# Altium PCB IP5568-MCU-188-3LED-ACL-V1.1.PcbDoc (part 1 of 2)
Units mm, origin at the board's own origin, x right, y up, seen from the top; angles counter-clockwise.
Board outline 55.37 x 39.29 mm, 4 copper layers (Top Layer, Mid-Layer 1, Mid-Layer 2, Bottom Layer); 97 components, 84 nets, 371 pads, 292 vias.
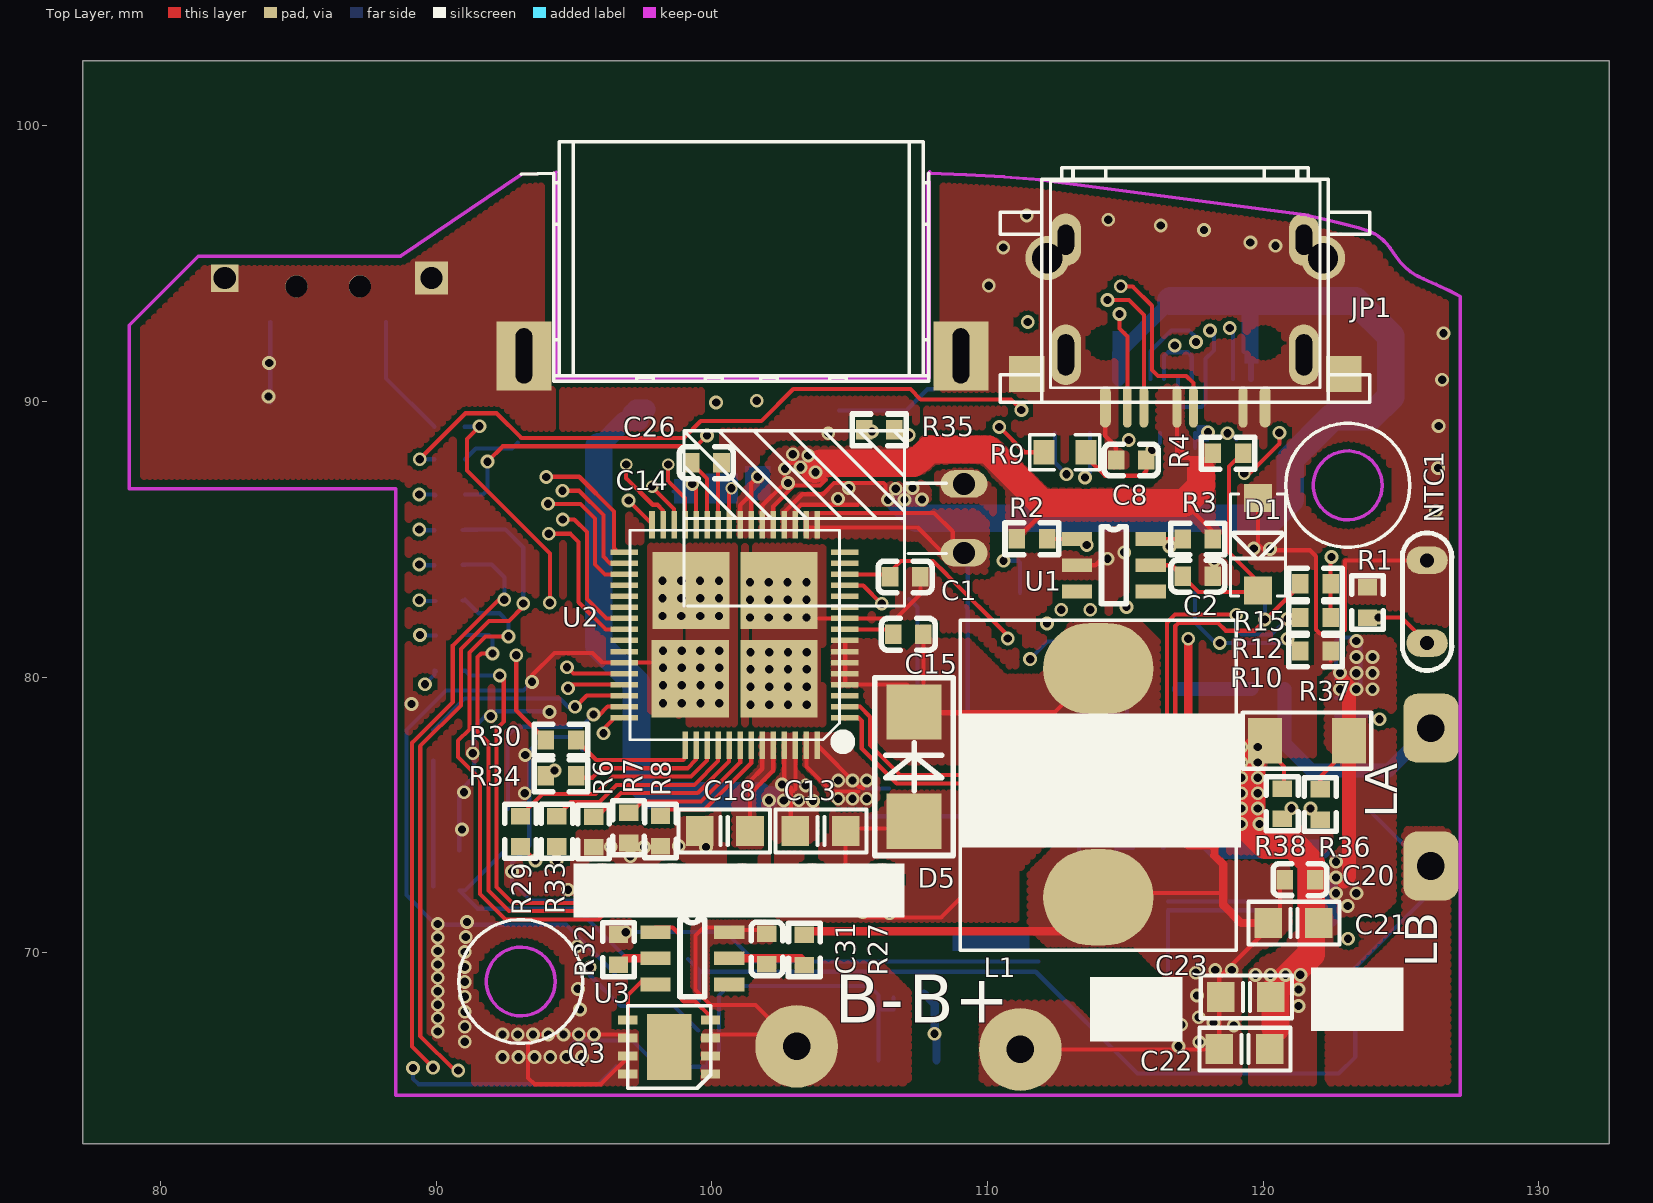
[diagram p0: Top Layer view]
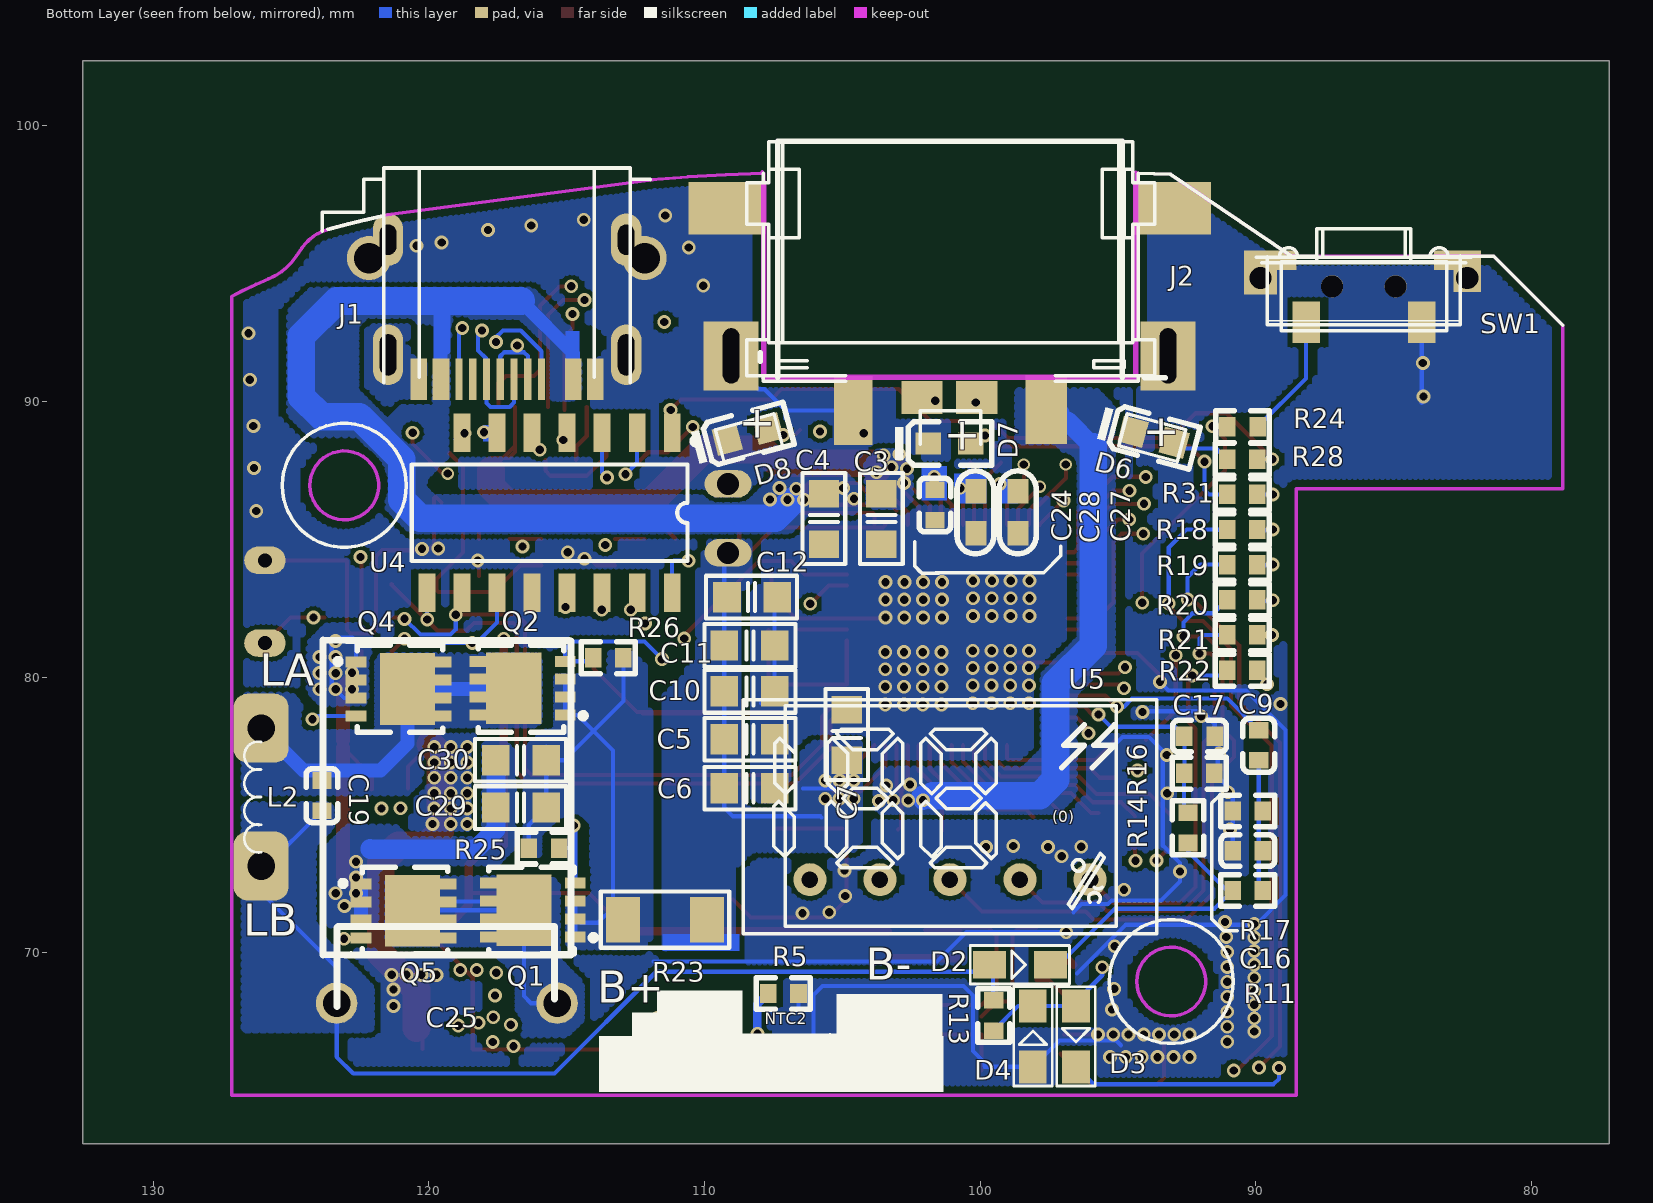
[diagram p1: Bottom Layer view, seen from below]
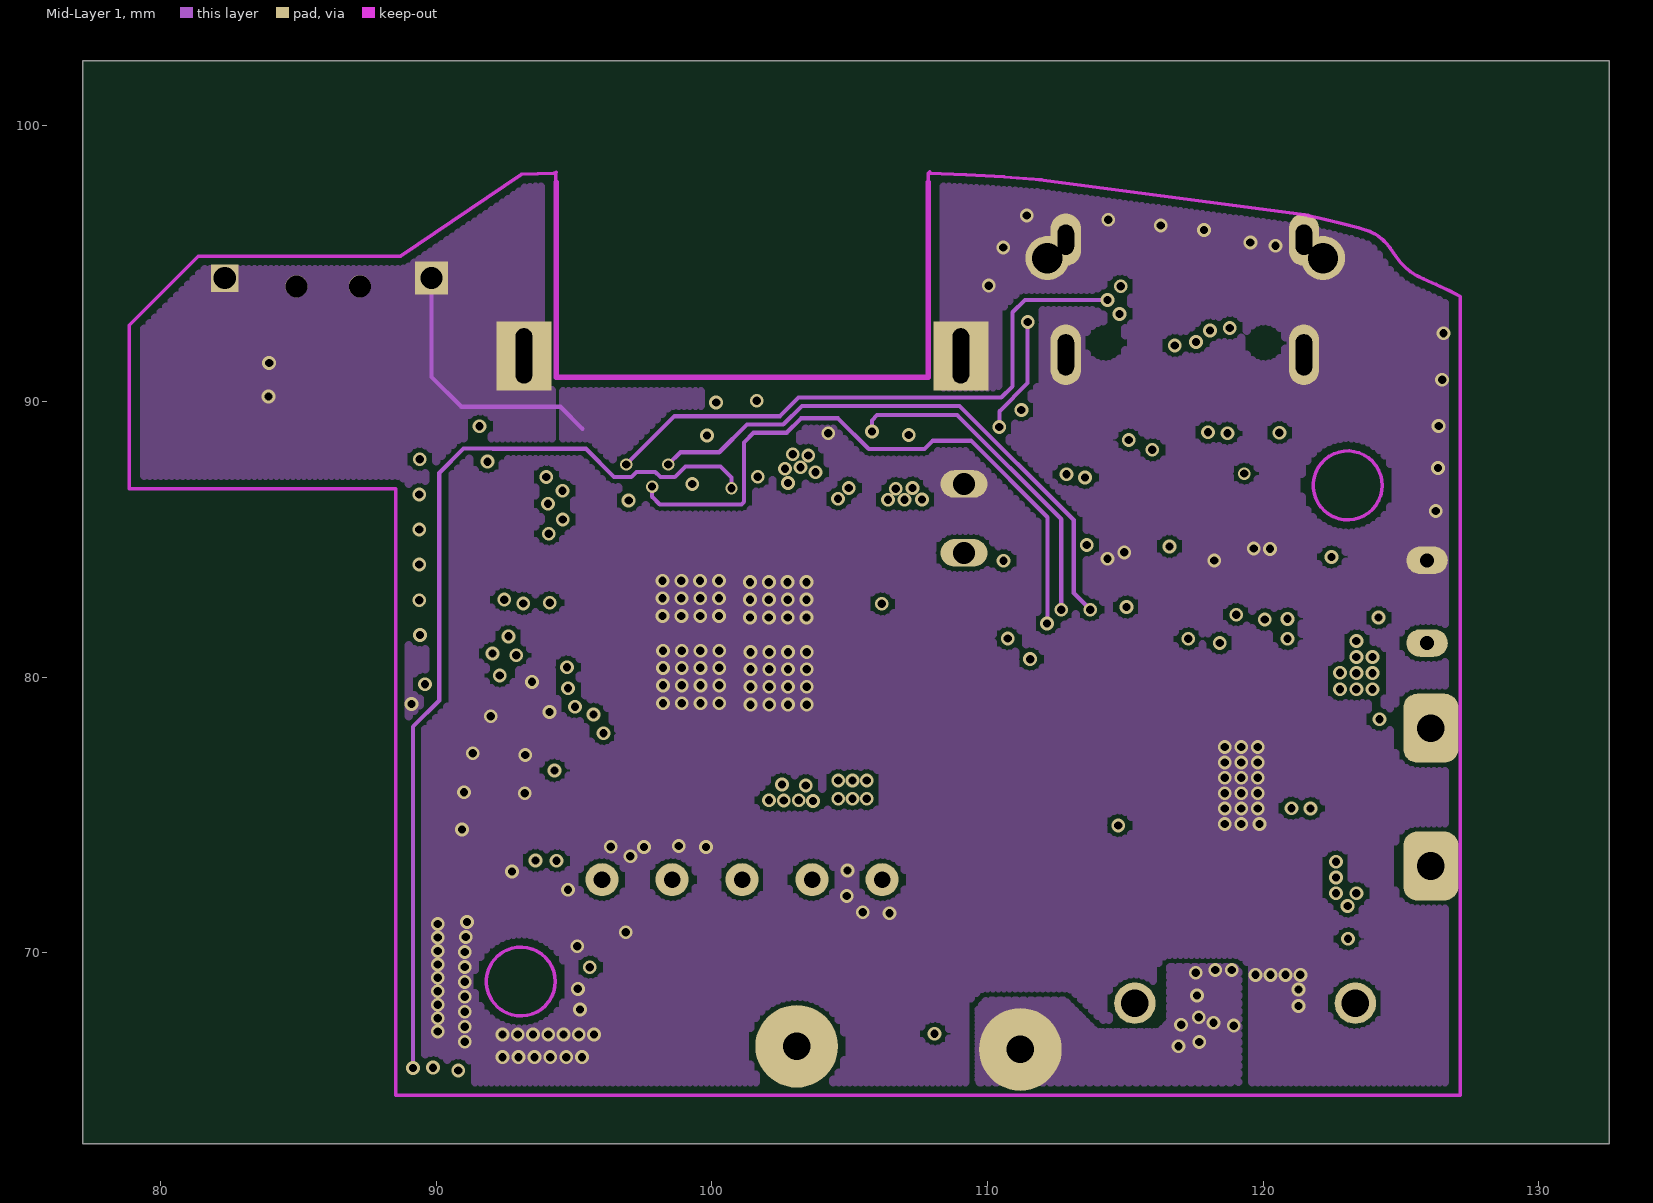
[diagram p2: Mid-Layer 1]
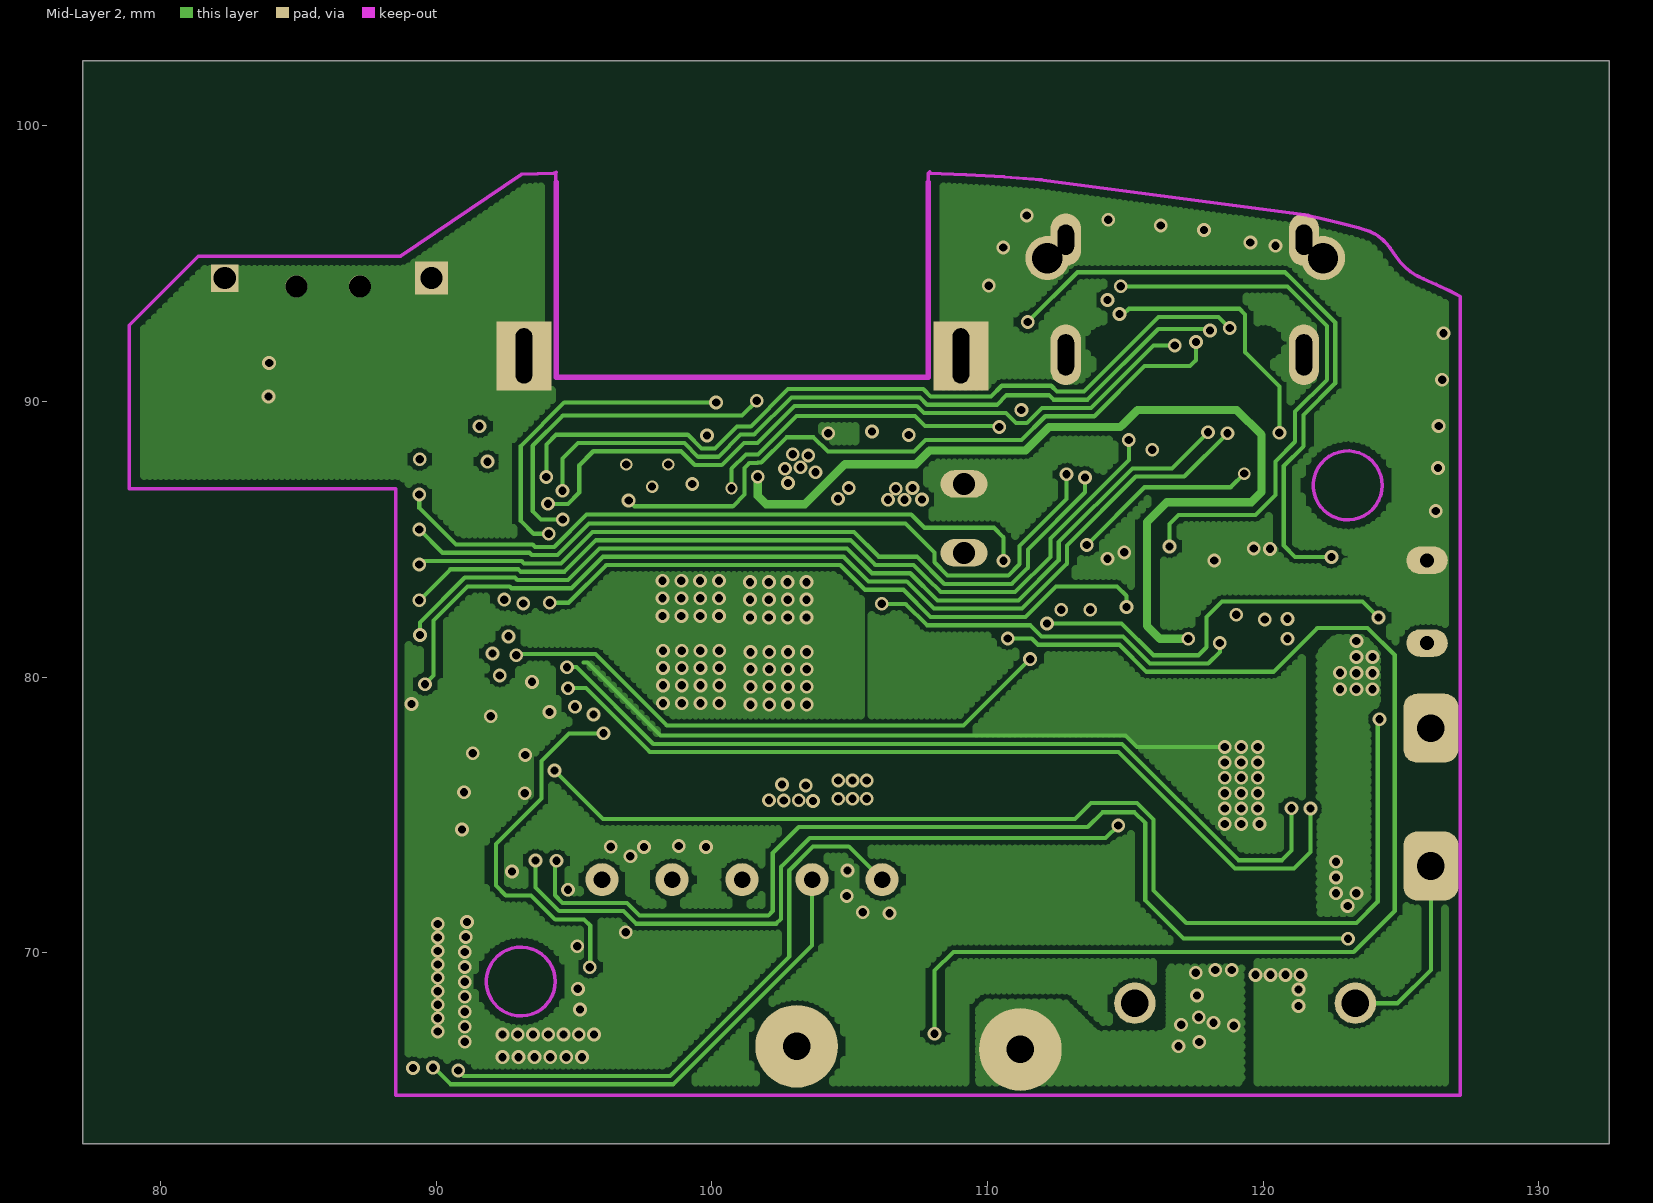
[diagram p3: Mid-Layer 2]
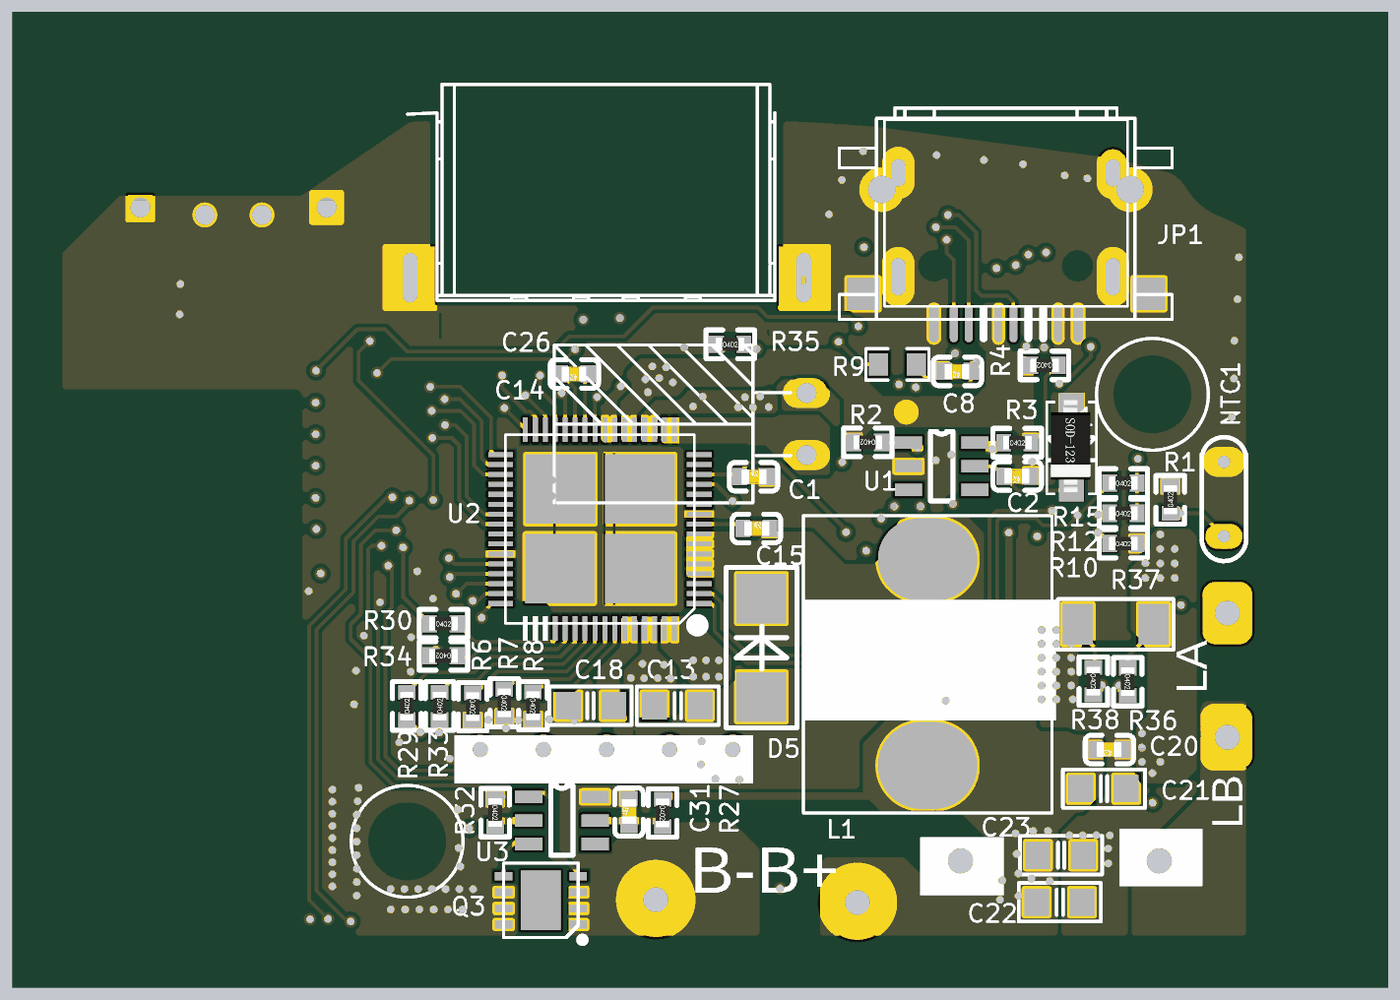
[diagram p5: 3D render of the assembled board from above, using the file's embedded part models]

## Layer stack, top to bottom
Top Layer: signal copper 0.0356
Dielectric: core 0.32, FR-4, Dk 4.8
Mid-Layer 1: signal copper 0.0356
Dielectric: prepreg 0.32, FR-4, Dk 4.8
Mid-Layer 2: signal copper 0.0356
Dielectric: core 0.32, FR-4, Dk 4.8
Bottom Layer: signal copper 0.0356

## Board outline
80.67,102.362 132.55,102.362 132.55,90.348 132.55,63.068 124.739,63.068 77.178,63.068 77.178,85.458 77.178,102.362

## Design rules (kind name [scope] priority, off if disabled: settings)
Clearance Clearance_1 [OnLayer('Keep-Out Layer')] p1: gap=0.254
Clearance [All] p2: gap=0.15
HoleToHoleClearance [All] p1: gap=0 allowstackedmicrovias=TRUE
MinimumSolderMaskSliver [All] p1: minsoldermaskwidth=0
PlaneConnect [All] p1: planeconnectstyle=Direct reliefexpansion=0.508 reliefentries=4 reliefconductorwidth=0.254 reliefairgap=0.254
PolygonConnect [All] p1: connectstyle=Direct reliefconductorwidth=0.254 reliefentries=4 polygonreliefangle="90 Angle"
RoutingVias [All] p1: holewidth=0.711 width=1.27 viastyle="Through Hole" minholewidth=0.2 minwidth=0.2 maxholewidth=0.711 maxwidth=1.27
SilkToSilkClearance [All] p1: silktosilkclearance=0
SilkscreenOverComponentPads [All] p1: minsilkscreentomaskgap=0
SolderMaskExpansion [All] p1: expansion=0.102
Width [All] p1: maxlimit=2 minlimit=0.15 preferedwidth=0.254
23 further rules are at their usual default settings.

## Components (designator, comment, footprint, x,y, rotation, side; value= is the part's Value field where it differs from the comment)
B+ "BAT+" BAT-3X3 111.188,66.497 r0 top
B- "BAT-" BAT-3X3 103.073,66.611 r0 top
C1 "100NF/10V" 0402C 107.01,83.642 r0 top
C2 "1UF/10V" 0402C 117.627,83.668 r180 top
C3 "10uF/16V" C0805 103.581,86.652 r270 bottom
C4 "10uF/16V" C0805 105.664,86.652 r270 bottom
C5 "22uF/16V" C0805 107.455,77.749 r0 bottom
C6 "22uF/16V" C0805 107.455,75.971 r0 bottom
C7 "22uF/16V" C0805 104.838,78.816 r270 bottom
C8 "100NF/16V" 0402C 115.214,87.884 r180 top
C9 "15nF/50V" 0402C 89.891,77.534 r270 bottom
C10 "22uF/16V" C0805 107.455,79.489 r0 bottom
C11 "22uF/16V" C0805 107.455,81.153 r0 bottom
C12 "22uF/16V" C0805 109.182,82.906 r180 bottom
C13 "10uF/16V" C0805 104.851,74.422 r180 top
C14 "NC" CAP-6.3X8-P2.5-S1 106.985,85.255 r180 top locked
C15 "100NF/25V" 0402C 107.124,81.559 r0 top
C16 "15nF/50V" 0402C 90.284,73.711 r0 bottom
C17 "2.2nF/50V" 0402C 92.037,77.864 r0 bottom
C18 "10uF/16V" C0805 99.555,74.422 r0 top
C19 "NC" 0402C 123.876,75.705 r270 bottom
C20 "100NF/10V" 0402C 121.336,72.657 r180 top
C21 "22uF/6.3V" C0805 122.009,71.082 r180 top
C22 "22uF/6.3V" C0805 120.231,66.51 r180 top
C23 "22uF/6.3V" C0805 120.282,68.402 r180 top
C24 "100NF/10V" 0402C 101.638,86.246 r90 bottom
C25 "400NF/100V/CBB" "CAP-CBB-404 100V" 119.342,68.174 r0 bottom locked
C26 "100NF/25V" 0402C 99.797,87.782 r180 top
C27 "2.2uF/10V" 0603C 98.615,85.979 r270 bottom
C28 "2.2uF/10V" 0603C 100.152,85.979 r270 bottom
C29 "10uF/16V" C0805 117.564,75.273 r180 bottom
C30 "10uF/16V" C0805 117.564,76.987 r180 bottom
C31 "100NF/16V" 0402C 101.994,70.142 r90 top
D1 "NC/ZMM5V6" SOD-123 119.812,84.823 r270 top
D2 "1N5819" SOD-323 98.552,69.571 r180 bottom
D3 "1N5819" SOD-323 96.52,66.967 r270 bottom
D4 "1N5819" SOD-323 98.082,66.967 r90 bottom
D5 "SS34" SMA 107.328,74.778 r90 top
D6 "绿灯 0603" LC-0603_LED_S1#1 93.701,88.709 r195 bottom
D7 "绿灯 0603" LC-0603_LED_S1#2 101.105,88.481 r180 bottom
D8 "绿灯 0603" LC-0603_LED_S1#1 108.433,88.824 r165 bottom
J1 "TYPEC_16PIN表贴" "TYPE C 2.0-16pin 表贴" 117.157,93.345 r180 bottom locked
J2 "USB-A 短体8.5沉板1.9" USB-AF8.5沉板1.9前插后贴 101.105,93.345 r0 bottom locked
JP1 "Lightning 母座表贴" Lightning_10 117.17,92.507 r0 top locked
L1 "2.2uH/10*10*4" L1040 112.7,73.52 r270 top
L2 "无线充线圈" 2P-2.5L 126.086,73.152 r90 bottom
NTC1 "100K/B=3950" NTC-插件#1 125.946,82.74 r90 top
NTC2 "100K/B=3950" NTC-插件#2 107.048,66.103 r180 bottom
Q1 "RU40L12M2" PDFN3333-8_L3.1-W3.2-P0.65-LS3.4-BL 116.218,71.552 r90 bottom
Q2 "RU40L12M2" PDFN3333-8_L3.1-W3.2-P0.65-LS3.4-BL 116.586,79.604 r90 bottom
Q3 "ET8830" ET-8830-DFN3x3-8L 98.45,66.586 r90 top
Q4 "RU3030M3" PDFN3333-8_L3.1-W3.2-P0.65-LS3.4-BL 121.107,79.572 r270 bottom
Q5 "RU3030M3" PDFN3333-8_L3.1-W3.2-P0.65-LS3.4-BL 120.929,71.52 r270 bottom
R1 "120K/1%" 0402R 123.787,82.715 r90 top
R2 "2.2K/5%" 0402R 111.608,85.026 r180 top
R3 "2.2K/5%" 0402R 117.627,85.014 r0 top
R4 "2.2K/5%" 0402R 118.72,88.125 r180 top
R5 "120K/1%" 0402R 107.137,68.529 r180 bottom
R6 "20K/1%" 0402R 95.707,74.384 r270 top
R7 "20K/1%" 0402R 96.977,74.536 r270 top
R8 "20K/1%" 0402R 98.133,74.422 r270 top
R9 "10R/5%" 0603R 112.801,88.163 r0 top
R10 "510K/5%" 0402R 121.895,80.95 r0 top
R11 "3.3K/1%" 0402R 90.291,72.263 r180 bottom
R12 "2.2K/5%" 0402R 121.895,82.169 r0 top
R13 "20K/1%" 0402R 99.504,67.729 r270 bottom
R14 "100K/1%" 0402R 92.456,74.536 r270 bottom
R15 "2.2K/5%" 0402R 121.895,83.388 r0 top
R16 "10K/1%" 0402R 92.05,76.517 r0 bottom
R17 "33K/1%" 0402R 90.291,75.146 r180 bottom
R18 "100R/5%" 0402R 90.487,85.361 r180 bottom
R19 "100R/5%" 0402R 90.487,84.087 r180 bottom
R20 "100R/5%" 0402R 90.487,82.812 r180 bottom
R21 "100R/5%" 0402R 90.487,81.538 r180 bottom
R22 "100R/5%" 0402R 90.487,80.251 r180 bottom
R23 "0R/5%" 1206 109.906,71.209 r0 bottom
R24 "10K/5%" 0402R 90.475,89.09 r180 bottom
R25 "NC" 0402R 115.824,73.8 r0 bottom
R26 "NC" 0402R 113.487,80.709 r180 bottom
R27 "470R/5%" 0402R 103.353,70.104 r270 top
R28 "100R/5%" 0402R 90.487,87.909 r0 bottom
R29 "2R/1%" 0402R 93.053,74.409 r90 top
R30 "2R/1%" 0402R 94.526,77.724 r0 top
R31 "100R/5%" 0402R 90.487,86.635 r0 bottom
R32 "2K/1%" 0402R 96.609,70.117 r270 top
R33 "2R/1%" 0402R 94.374,74.409 r90 top
R34 "2R/1%" 0402R 94.526,76.429 r180 top
R35 "100R" 0402R 106.07,88.976 r0 top
R36 "0R/1%" 0402R 122.072,75.387 r270 top
R37 "20mR/1%/1206" 1206 120.066,77.699 r0 top
R38 "0R/1%" 0402R 120.688,75.413 r270 top
SW1 "3*6*3.5测按按键" SW-3X6X3.5mm-定位柱0.7-通孔 87.224,94.183 r270 bottom
U1 "苹果握手协议芯片" SOT23-6 113.246,85.014 r0 top
U2 "IP5568_LED" QFN64-8*8-0.4 100.825,81.534 r180 top
U3 "CM1003-S11ED-4.4V" SOT23-6 97.955,70.752 r0 top
U4 "MCU" SOP16L 115.621,85.966 r0 bottom
U5 "SMG-188" SMG-188-CYZ2342-5-75BWGD 101.092,72.657 r180 bottom locked

## Footprints (in the part's own frame and the unit in brackets; to place one, negate y for a bottom-side part, rotate by r counter-clockwise, add the part's x,y. Pads: shape width x height; smd on the part's side, far side on the other; paste and mask are expansions set on the pad)
2P-2.5L [mm]
  rrect50% 2.5x2 hole 1: 1(0,0) 2(5,0)
  silkscreen extent 0.49,0 4.51,0.61
0402C [mm]
  rect 0.6x0.7 smd mask+0.051: 1(-0.55,0) 2(0.55,0)
  silkscreen extent -0.97,-0.58 0.97,0.58, body extent -0.48,-0.3 0.52,0.3, height 0.2
0402R [mm]
  rect 0.6x0.7 smd mask+0.051: 1(-0.55,0) 2(0.55,0)
  silkscreen extent -0.97,-0.58 0.97,0.58, body extent -0.57,-0.27 0.58,0.28, height 0.41
0603C [mil]
  rect 35x30 smd: 1(-30,0) 2(30,0)
  silkscreen extent -59,-27 59,26
0603R [mil]
  rect 30x35.43 smd: 1(-30,0) 2(30,0)
  silkscreen extent -50,-25 50,25
1206 [mil]
  rect 48x65 smd: 1(0,0) 2(120,0)
  silkscreen extent -32,-40 152,40
BAT-3X3 [mm]
  round 3 hole 1: 1(0,0)
C0805 [mm]
  rect 1x1.1 smd: 1(0,0) 2(1.826,0)
  silkscreen extent -0.76,-0.77 2.55,0.77
CAP-6.3X8-P2.5-S1 [mm] "Electrolytic CAP; 2 Leads, P=2.5mm,body:6.3*12"
  oval 1.7x1 hole 0.8: 1(-2.159,0.742) 2(-2.159,-1.758)
  silkscreen extent -1.52,-3.68 8,2.67
"CAP-CBB-404 100V" [mm] "CBB电容"
  round 1.5 hole 1: 1(-4,0) 2(4,0)
  silkscreen extent -4.5,-13.17 4.5,0.11
ET-8830-DFN3x3-8L [mm]
  round 0.5 on Top Overlay: 0(-1.59,-1.67)
  rect 2.4x1.6 smd: 0(0,0)
  rect 0.33x0.7 smd: 1(-0.975,-1.5) 2(-0.325,-1.5) 3(0.325,-1.5) 4(0.975,-1.5) 5(0.975,1.5) 6(0.325,1.5) 7(-0.325,1.5) 8(-0.975,1.5)
  silkscreen extent -1.5,-1.5 1.5,1.5
L1040 [mm]
  oval 3.3x4 smd: 1(-6.793,1.318)
  oval 3.5x4 smd: 2(1.507,1.318)
  silkscreen extent -8.56,-3.68 3.42,6.32
LC-0603_LED_S1#1 [mm]
  rect 0.93x0.98 smd: A(0.77,0) K(-0.77,0)
  silkscreen extent -1.98,-0.79 1.54,0.79, body extent -1,-0.8 1,0.8, height 0.6
LC-0603_LED_S1#2 [mm]
  rect 0.93x0.8 smd: A(0.77,0) K(-0.77,0)
  silkscreen extent -1.98,-0.79 1.54,0.79, body extent -0.8,-0.4 0.8,0.4, height 0.6
Lightning_10 [mm] "铁壳"
  rect 1.3x1.3 smd: 0(-5.751,-1.5) 0(5.751,-1.5)
  round 1.6 hole 1.1: 0(-5,2.7) 0(5,2.7)
  oval 0.4x1.5 smd: 1(2.9,-2.7) 10(-2.9,-2.7)
  oval 0.32x1.5 smd: 2(2.1,-2.7) 5(0.3,-2.7) 6(-0.3,-2.7) 8(-1.5,-2.7) 9(-2.1,-2.7)
  oval 0.32x1.5 on Top Overlay: 3(1.5,-2.7) 4(0.9,-2.7) 7(-0.9,-2.7)
  silkscreen extent -4.89,-2 4.89,6
NTC-插件#1 [mm]
  oval 1x1.5 hole 0.5: 1(-1.5,0) 2(1.5,0)
  silkscreen extent -2.49,-0.9 2.49,0.9
NTC-插件#2 [mm]
  oval 1x1.5 smd: 1(-1.1,0) 2(1,0)
  silkscreen extent -2.49,-0.9 2.49,0.9
PDFN3333-8_L3.1-W3.2-P0.65-LS3.4-BL [mm]
  rect 0.4x0.75 smd paste-100 mask+0.051: 1(-0.975,-1.533) 2(-0.325,-1.533) 3(0.325,-1.533) 4(0.975,-1.533)
  rect 0.4x0.8 smd paste-100 mask+0.051: 5(0.975,1.533) 6(0.325,1.533) 7(-0.325,1.533) 8(-0.975,1.533)
  rect 2.6x2 smd paste-100 mask+0.051: 9(-0.005,0.333)
  silkscreen extent -1.59,-2.29 1.56,1.61
QFN64-8*8-0.4 [mm]
  rect 1x0.2 smd: 1(-4,3) 2(-4,2.6) 3(-4,2.2) 4(-4,1.8) 5(-4,1.4) 6(-4,1) 7(-4,0.6) 8(-4,0.2) 9(-4,-0.2) 10(-4,-0.6) 11(-4,-1) 12(-4,-1.4) 13(-4,-1.8) 14(-4,-2.2) 15(-4,-2.6) 16(-4,-3) 33(4,-3) 34(4,-2.6) 35(4,-2.2) 36(4,-1.8) 37(4,-1.4) 38(4,-1) 39(4,-0.6) 40(4,-0.2) 41(4,0.2) 42(4,0.6) 43(4,1) 44(4,1.4) 45(4,1.8) 46(4,2.2) 47(4,2.6) 48(4,3)
  rect 0.2x1 smd: 17(-3,-4) 18(-2.6,-4) 19(-2.2,-4) 20(-1.8,-4) 21(-1.4,-4) 22(-1,-4) 23(-0.6,-4) 24(-0.2,-4) 25(0.2,-4) 26(0.6,-4) 27(1,-4) 28(1.4,-4) 29(1.8,-4) 30(2.2,-4) 31(2.6,-4) 32(3,-4) 52(1.8,4) 53(1.4,4) 54(1,4) 55(0.6,4) 56(0.2,4) 57(-0.2,4) 58(-0.6,4) 59(-1,4) 60(-1.4,4) 61(-1.8,4) 62(-2.2,4) 63(-2.6,4) 64(-3,4)
  rect 0.2x1 on Top Overlay: 49(3,4) 50(2.6,4) 51(2.2,4)
  rect 2.8x2.8 smd: 65(-1.612,1.588) 65(-1.612,-1.612) 65(1.588,-1.612) 65(1.613,1.588)
  silkscreen extent -4.12,-3.8 3.8,4.07
SMA [mm]
  rect 2x2 smd: 1(0,0) 2(3.962,0)
  silkscreen extent -1.24,-1.42 5.21,1.42
SMG-188-CYZ2342-5-75BWGD [mm]
  round 1.2 hole 0.6: 1(-5.08,0) 2(-2.54,0) 3(0,0) 4(2.54,0) 5(5.08,0)
  silkscreen extent -7.5,-1.97 7.5,6.53
SOD-123 [mil]
  rect 40x40 smd mask+0.98: 1(-65.94,0) 2(65.94,0)
  silkscreen extent -72,-39 74,39, body extent -75,-33 71,30, height 47
SOD-323 [mm]
  rect 1.2x1 smd: A(-1.1,0) K(1.1,0)
  silkscreen extent -1.8,-0.7 1.8,0.7
SOP16L [mm]
  rect 0.6x1.4 smd: 1(-4.445,-2.9) 2(-3.175,-2.9) 3(-1.905,-2.9) 4(-0.635,-2.9) 5(0.635,-2.9) 6(1.905,-2.9) 7(3.175,-2.9) 9(4.445,2.9) 10(3.175,2.9) 11(1.905,2.9) 12(0.635,2.9) 13(-0.635,2.9) 14(-1.905,2.9) 15(-3.175,2.9) 16(-4.445,2.9)
  rect 0.6x1.4 on Bottom Overlay: 8(4.445,-2.9)
  silkscreen extent -5.39,-2.7 5,1.75
SOT23-6 [mm]
  rect 1.1x0.5 smd: 1(0,0) 2(0,-0.95) 3(0,-1.9) 4(2.676,-1.9) 5(2.676,-0.95) 6(2.676,0)
  silkscreen extent 0.89,-2.35 1.79,0.45
SW-3X6X3.5mm-定位柱0.7-通孔 [mm] "TS-B003-Y"
  rect 0.7x1.9 smd: 0(-0.945,-2.248)
  rect 0.7x1.7 smd: 0(-0.945,4.55)
  rect 1.2x1.2 hole 0.8: 0(-0.3,-2.6)
  rect 1x1 hole 0.8: 0(-0.3,4.9)
  round 0.8 hole 0.8 unplated: 0(0,0) 0(0,2.3)
  rect 1.5x1 smd: 1(1.3,-0.95) 2(1.3,3.25)
  silkscreen extent -2.08,-2.75 1.4,5.05
"TYPE C 2.0-16pin 表贴" [mm]
  oval 1.1x2.2 hole 0.6 slot 1.5 at 90 deg: 0(-4.32,-1.65) 0(4.32,-1.65)
  oval 1.1x1.9 hole 0.6 slot 1.1 at 90 deg: 0(-4.32,2.53) 0(4.32,2.53)
  round 0.75 on Keep-Out: 0(-2.89,-1.211) 0(2.89,-1.211)
  round 0.75 on Mech1: 0(-2.89,-1.211) 0(2.89,-1.211)
  rect 0.6x1.5 smd: A1(3.2,-2.529) A4(2.4,-2.529) B1(-3.2,-2.529) B4(-2.4,-2.529)
  rect 0.26x1.5 smd: A5(1.25,-2.529) A6(0.25,-2.53) A7(-0.25,-2.53) A8(-1.25,-2.53) B5(-1.75,-2.529) B6(-0.75,-2.53) B7(0.75,-2.53)
  rect 0.26x1.5 on Bottom Overlay: B8(1.75,-2.53)
  silkscreen extent -4.47,-2.28 4.47,5.13
USB-AF8.5沉板1.9前插后贴 [mm]
  rect 2.8x1.9 smd: 0(-8.077,-3.665) 0(8.077,-3.665)
  rect 2x2.5 hole 0.6 slot 2 at 90 deg: 0(-7.925,1.685) 0(7.925,1.685)
  rect 1.4x2.5 smd: 1(3.5,3.665)
  rect 1.5x1.2 smd: 2(1,3.2) 3(-0.991,3.2)
  rect 1.5x2.5 smd: 4(-3.5,3.625)
  Keep-Out Layer lines w0.2: -6.75,2.457 -6.75,-4.615 ; 6.75,2.467 6.75,-4.615
  Keep-Out Layer lines w0.203: -6.692,2.46 6.717,2.46
  silkscreen extent -7.82,-6.1 6.88,2.48

## Part data
C1 C3 C4 C5 C6 C7 C9 C10 C11 C12 C13 C15 C16 C17 C18 C19 C20 C21 C22 C23 C24 C25 C26 C27 C28 C29 C30: library part CAP, "Capacitor"
C2 C8 C31: library part CAP-0603
C14: library part "CAPACITOR POL", "Capacitor"
D1: library part "LL-34 ZMM5V6", "稳压二极管"
D2 D3 D4 D5: library part DIODE, "Diode"
D6 D7 D8: library part "0603 绿灯", "发光二极管"
J2: library part USB--A-4PIN, "USB-A"
L1 L2: library part INDUCTOR, "电感"
NTC1 NTC2: library part NTC, "温敏电阻"
Q1 Q2: library part PMOS-DFN3333_1, "PMOS-DFN3333"
Q3: "NMOS-DUAL-N"
Q4 Q5: library part NMOS-DFN3333, "NMOS-DFN3333"
R1 R2 R3 R4 R5 R6 R7 R8 R9 R10 R11 R12 R13 R14 R15 R16 R17 R18 R19 R20 R21 R22 R23 R24 R25 R26 R28 R29 R30 R31 R33 R34 R35 R36 R37 R38: library part RES1
R27 R32: library part RES-0603
SW1: library part KEY-3*6*3.5mm, "侧按按键"
U1: library part LP05
U2: library part IP5568, "移动电源快充+无线充快充TX/RX"
U3: library part CM1003, "锂电保护芯片"
U4: library part MCU_NY8A054E
U5: library part SMG-188-YFT1508SWPGAD-5D-1

## Free pads (board coordinates)
  round 1 on Top Solder: 0(113.159,86.244)
  round 0.7 on Bottom Overlay: 1(114.275,78.549) 2(123.406,80.556) 3(114.224,69.723) 4(123.33,72.581)
  round 0.7 on Bottom Solder: 5(95.606,83.655) 6(123.761,91.821) 7(82.385,89.078) 8(125.235,69.748) 9(89.357,67.069)

## Via types
v1: diameter 0.5, hole 0.3, Top Layer to Bottom Layer, tented both sides, 287 vias
v2: diameter 0.45, hole 0.3, Top Layer to Bottom Layer, tented both sides, 5 vias

## Nets (pads, with @x,y where several pads share a name; then routed paths per layer and width w, separated by ;. In a path a pad name is that pad's centre, name@x,y a point inside that pad or via, vN(x,y) a via of type N, cw(c..) or ccw(c..) an arc to the next point about the centre after c; other vN are vias at no path point)
B+: B+.1 C20.2 C21.2 C22.2 C23.2 C24.2 L1.2 R27.1 U2.23 U2.24 | length 78.6
  Top Layer w0.15: U2.24@101.025,85.534 101.025,86.239 101.425,86.639 ; U2.23@101.425,85.534 101.425,86.639 ; v1(101.663,87.274) 101.425,87.036 101.425,86.639 ; B+.1@111.188,66.497 118.392,66.497 C22.2@118.405,66.51 118.405,69.103 C21.2@120.183,70.881 ; L1.2@112.785,70.781 L1.2@114.018,72.013 114.182,72.178 118.554,72.178 ; C21.2@120.183,71.082 120.612,71.511 120.612,72.483 C20.2@120.786,72.657
  Top Layer w0.3: R27.1@103.353,70.781 L1.2@112.785,70.781 ; v1(117.284,81.394) 117.284,73.9 118.231,73.9 ; 118.224,73.533 118.554,73.203 118.554,72.178 118.554,71.73 119.202,71.082 C21.2@120.183,71.082 ; 118.231,73.576 118.231,73.9 ; 118.259,73.872 118.231,73.9
  Mid-Layer 2 w0.3: v1(101.663,87.274) 101.663,86.576 101.962,86.277 103.375,86.277 104.829,87.732 107.401,87.732 107.897,88.228 111.381,88.228 112.231,89.078 114.818,89.078 ; 114.901,89.158 115.443,89.7 119.037,89.7 119.939,88.798 119.939,86.716 119.577,86.353 116.503,86.353 115.786,85.636 115.786,81.864 116.256,81.394 v1(117.284,81.394)
  Bottom Layer w0.15: C24.2@101.321,87.008 C24.2@101.359,87.008
  other v1: 116.929,66.611 117.679,66.767 118.935,67.361 117.022,67.391 118.199,67.462 117.665,67.666 117.602,68.453 117.551,69.278 118.262,69.38 118.859,69.38
BAT-: B-.1 C31.2 Q3.1 Q3.2 Q3.3 U3.6 | length 13.1
  Top Layer w0.15: Q3.1@99.95,65.738 99.95,66.388 99.95,67.038 B-.1@102.647,67.038 ; U3.6@100.631,70.917 99.695,70.917 99.403,70.625 99.403,68.66 99.953,68.11 101.575,68.11 B-.1@103.073,66.611 ; U3.6@100.716,70.832 C31.2@101.994,70.832
CC1: J1.A5 U2.32 | length 28.9
  Top Layer w0.15: v1(96.977,86.411) 97.825,85.563 U2.32@97.825,85.534
  Mid-Layer 2 w0.15: v1(96.977,86.411) 97.186,86.202 100.757,86.202 101.186,86.632 101.186,87.597 101.356,87.767 101.663,87.767 ; 101.663,87.786 101.789,87.786 102.709,88.706 103.688,88.706 104.205,88.189 107.328,88.189 107.742,88.603 111.225,88.603 112.093,89.47 113.872,89.47 115.69,91.288 117.348,91.288 117.564,91.504 v1(117.564,92.164)
  Bottom Layer w0.15: J1.A5@115.907,90.816 115.907,91.827 116.664,92.583 117.31,92.583 v1@117.589,92.304
CC2: J1.B5 U2.33 | length 35.3
  Top Layer w0.15: v1@94.031,87.274 95.186,87.274 96.444,86.017 96.444,85.42 96.444,85.065 96.444,84.684 96.593,84.534 U2.33@96.825,84.534
  Mid-Layer 2 w0.15: v1(93.993,87.262) 93.993,88.443 94.348,88.798 99.125,88.798 99.625,88.298 100.109,88.298 100.914,89.103 101.409,89.103 102.761,90.454 107.667,90.454 107.937,90.185 110.123,90.185 110.514,90.576 112.311,90.576 112.516,90.37 113.5,90.37 116.2,93.071 118.384,93.071 v1(118.783,92.672)
  Bottom Layer w0.15: J1.B5@118.907,90.816 v1@118.907,92.548
CL: JP1.8 U2.31 | length 29.2
  Top Layer w0.15: v2(96.888,87.719) 96.888,87.222 97.852,86.259 98.018,86.259 98.225,86.052 U2.31@98.225,85.534 ; v1(114.351,93.688) 115.126,93.688 115.67,93.143 JP1.8@115.67,89.807
  Mid-Layer 1 w0.15: v2(96.888,87.719) 98.641,89.471 102.464,89.471 103.137,90.145 110.498,90.145 110.909,90.556 110.909,93.243 111.354,93.688 v1(114.351,93.688)
COIL_I: C29.1 C30.1 Q4.1 Q4.2 Q4.3 Q5.1 Q5.2 Q5.3 R36.1 R37.2 | length 23.1
  Top Layer w0.15: R36.1@122.072,75.937 122.072,76.403 123.114,77.445 R37.2@123.114,77.699
  Top Layer w0.5: 122.86,79.921 123.114,79.667 R37.2@123.114,77.699 ; 122.936,72.581 123.114,72.758 123.114,73.304 ; 123.114,73.393 123.114,74.689 R37.2@123.114,77.445
  Bottom Layer w0.15: Q4.3@122.641,79.247 123.074,79.247 123.52,79.692 123.52,80.15 123.52,81.28 123.355,81.445 122.771,81.445 122.641,81.315 Q4.1@122.641,80.547 Q4.2@122.641,79.897
  Bottom Layer w0.5: Q5.3@122.463,71.195 Q5.2@122.463,71.845 Q5.1@122.463,72.495
  Bottom Layer w0.7: C30.1@117.564,76.987 C29.1@117.564,75.273 117.564,74.486 118.288,73.762 119.075,73.762 119.507,73.762 120.307,73.762 122.123,73.762 122.136,73.774
  other v1: 123.063,71.704 122.644,72.161 123.38,72.161 122.644,72.733 122.644,73.304 122.784,79.566 123.38,79.566 123.965,79.566 122.784,80.162 123.38,80.15 123.965,80.15 123.38,80.734 123.965,80.734 123.38,81.318
COIL_V: C19.2 C25.2 D2.A L2.1 R13.1 | length 45.2
  Mid-Layer 2 w0.15: C25.2@123.342,68.174 123.444,68.174 124.879,68.174 126.086,69.38 L2.1@126.086,73.152
  Bottom Layer w0.15: D2.A@99.131,69.774 D2.A@99.53,69.375 ; R13.1@99.53,68.266 D2.A@99.53,69.375 ; C19.2@123.876,75.155 125.979,73.051 125.979,72.106 123.342,69.468 C25.2@123.342,68.174 123.342,66.23 122.741,65.629 115.435,65.629 111.747,69.317 108.788,69.317 99.588,69.317 D2.A@99.53,69.375
DATA1: JP1.9 R2.1 U1.1 | length 22.8
  Top Layer w0.15: R2.1@112.17,85.014 U1.1@113.246,85.014 ; v1@114.78,93.178 114.78,92.649 115.07,92.359 JP1.9@115.07,89.807 JP1.9@115.07,89.707 ; v2@119.501,87.389 120.587,88.474 v1(120.587,88.875)
  Mid-Layer 2 w0.15: v1(113.602,84.798) 115.697,86.893 118.821,86.893 v2(119.316,87.389) ; v1@114.935,93.18 115.126,93.371 119.138,93.371 119.343,93.166 119.343,91.793 120.587,90.55 v1(120.587,88.875)
  other v1: 114.783,93.18
DATA2: JP1.5 R3.1 U1.6 | length 27.6
  Top Layer w0.15: v1(114.833,94.183) 115.265,94.183 115.97,93.478 115.97,91.141 116.18,90.932 117.208,90.932 117.47,90.67 JP1.5@117.47,89.807 ; U1.6@115.922,85.014 R3.1@117.077,85.014
  Mid-Layer 2 w0.15: v1(114.833,94.183) 120.879,94.183 122.314,92.748 122.314,90.792 121.158,89.637 121.158,88.544 120.447,87.833 120.447,86.614 119.723,85.89 116.929,85.89 116.599,85.56 v1(116.599,84.747)
DMA1: J2.3 U2.40 | length 17.2
  Top Layer w0.15: v1@94.043,85.128 v1@94.082,85.128 ; v1(94.082,85.204) 94.871,85.204 95.163,84.912 95.163,82.721 96.15,81.734 U2.40@96.825,81.734
  Mid-Layer 2 w0.15: v1(94.082,85.204) 93.535,85.204 93.066,85.674 93.066,88.392 94.64,89.967 v1(100.152,89.967)
DMA2: U2.42
DMB: U2.37
DMC: J1.A7 J1.B7 U2.35 | length 34.2
  Top Layer w0.15: v1@94.074,86.291 95.23,86.291 95.763,85.758 95.763,84.095 96.123,83.734 U2.35@96.825,83.734
  Mid-Layer 2 w0.15: v1@94.061,86.291 94.774,86.291 95.186,86.704 95.186,87.69 95.694,88.198 98.876,88.198 99.377,87.698 100.358,87.698 101.163,88.503 101.658,88.503 102.995,89.84 107.433,89.84 107.688,89.585 110.67,89.585 111.03,89.225 111.423,89.225 111.969,89.77 113.748,89.77 116.015,92.037 v1(116.789,92.037)
  Bottom Layer w0.15: J1.B7@116.407,90.815 116.407,91.655 116.542,91.79 117.265,91.79 117.407,91.647 J1.A7@117.407,90.815
  other v1: 94.056,86.296
DNGATE1: R33.2 U2.55 | length 7.3
  Top Layer w0.15: R33.2@94.374,74.959 94.878,75.463 95.898,75.463 96.531,76.097 99.361,76.097 100.225,76.962 U2.55@100.225,77.534
DNGATE2: R34.1 U2.53 | length 5.4
  Top Layer w0.15: R34.1@95.076,76.352 95.656,76.352 96.001,76.697 96.393,76.697 ; 96.177,76.697 96.393,76.697 ; U2.53@99.425,77.534 99.425,77.01 99.112,76.697 96.393,76.697
DPA1: J2.2 U2.39 | length 17.5
  Top Layer w0.15: v1(94.59,85.725) 95.006,85.725 95.463,85.268 95.463,82.845 96.174,82.134 U2.39@96.825,82.134
  Mid-Layer 2 w0.15: v1(94.59,85.725) 93.797,85.725 93.497,86.025 93.497,88.4 94.59,89.492 101.087,89.492 v1(101.625,90.03)
DPA2: U2.41
DPB: U2.36
DPC: J1.A6 J1.B6 U2.34 | length 36.2
  Top Layer w0.15: v1(94.577,86.766) 95.179,86.766 96.063,85.883 96.063,84.378 96.307,84.134 U2.34@96.825,84.134
  Mid-Layer 2 w0.15: v1(94.577,86.766) 94.577,87.935 95.141,88.498 99.001,88.498 99.501,87.998 100.233,87.998 101.038,88.803 101.534,88.803 102.885,90.154 107.543,90.154 107.812,89.885 110.345,89.885 110.693,90.233 112.229,90.233 112.392,90.07 113.624,90.07 116.192,92.639 118.016,92.639 v1(118.072,92.583)
  Bottom Layer w0.15: J1.A6@116.907,90.815 116.907,89.963 117.063,89.807 117.76,89.807 117.908,89.955 J1.B6@117.908,90.815 117.908,91.555 118.212,91.859 v1@118.212,92.443
FCAP: R6.1 U2.56 | length 6.3
  Top Layer w0.15: R6.1@95.707,75.074 95.978,75.074 96.701,75.797 99.485,75.797 100.625,76.937 U2.56@100.625,77.534
FOD_DET: D3.A D4.K R13.2 U2.48 | length 19.6
  Top Layer w0.15: v1@95.936,77.991 96.479,78.534 U2.48@96.825,78.534
  Mid-Layer 2 w0.15: v1@95.529,69.494 95.585,69.55 95.585,70.988 95.36,71.213 94.313,71.213 93.441,72.085 92.519,72.085 92.164,72.441 92.164,73.952 93.81,75.598 93.81,76.957 94.818,77.965 v1(96.063,77.965)
  Bottom Layer w0.15: v1(95.567,69.482) 95.567,69.19 96.69,68.067 D4.K@98.082,68.067 98.617,68.067 R13.2@99.504,67.179
GND: C1.2 C2.1 C3.2 C4.2 C5.1 C6.1 C7.1 C8.2 C10.1 C11.1 C12.2 C13.1 C14.2 C16.2 C17.1 C18.1 C20.1 C21.1 C22.1 C23.1 C24.1 C27.2 C28.2 D1.1 D4.A D5.1 D6.K D7.K D8.K J1.0@112.837,91.695 J1.0@112.837,95.875 J1.0@121.477,91.695 J1.0@121.477,95.875 J1.A1 J1.B1 J2.0 J2.1 JP1.0 JP1.1 JP1.2 JP1.10 NTC1.2 NTC2.2 Q3.6 Q3.7 Q3.8 R1.2 R5.2 R6.2 R7.2 R8.2 R10.2 R16.1 R17.1 R32.1 R37.1 R38.1 SW1.0 SW1.2 U1.2 U2.10 U2.43 U2.65 U4.12 | length 189.6
  Top Layer w0.15: v1@93.472,79.718 v1(93.472,79.832) 93.472,80.073 94.285,80.886 95.669,80.886 96.021,80.534 U2.43@96.825,80.534 U2.65@98.624,80.534 ; Q3.6@96.95,67.038 v1(95.72,67.038) v1(95.167,67.038) v1(94.615,67.038) v1(94.063,67.038) 93.695,67.038 93.332,66.675 93.332,65.464 93.561,65.236 95.974,65.236 Q3.7@97.079,66.341 ; U2.65@103.45,82.134 U2.10@104.825,82.134 ; U2.10@104.825,82.134 106.671,82.134 107.56,83.024 C1.2@107.56,83.642 ; C13.1@104.851,74.422 104.851,71.933 105.499,71.285 108.318,71.285 108.966,71.933 ; C13.1@104.991,74.511 D5.1@107.366,74.511 ; C1.2@107.56,83.82 C1.2@107.692,83.688 ; U1.2@113.246,84.064 113.909,84.064 v1@114.236,84.391 ; JP1.10@114.27,89.807 114.27,88.747 114.65,88.367 ; C8.2@114.664,87.884 114.65,87.898 114.65,88.367 ; 114.664,88.353 114.65,88.367 ; v1@118.173,84.303 118.177,84.299 C2.1@118.177,83.668 C2.1@118.177,83.748 ; D1.1@119.545,86.346 D1.1@119.761,86.562 ; D1.1@119.812,86.498 119.812,84.836 120.04,84.607 121.703,84.607 ; R37.1@119.939,77.572 120.752,76.759 R38.1@120.752,75.963 ; C22.1@120.231,66.51 120.231,68.847 121.886,70.502 C20.1@121.886,72.657 ; 121.704,84.607 121.703,84.607 ; R10.2@122.445,80.611 R10.2@122.445,80.95 ; NTC1.2@125.946,84.24 122.988,84.24 122.97,84.222 122.97,81.726 122.838,81.594 122.051,81.594 121.92,81.726 121.92,84.391 121.703,84.607
  Top Layer w1: R37.1@119.939,77.572 119.583,77.216 119.583,74.398 120.069,73.913 121.099,73.913 121.736,73.276 121.736,69.945 120.447,68.656 120.447,67.272
  Mid-Layer 1 w0.15: SW1.0@89.824,94.483 89.824,90.897 90.907,89.814 94.501,89.814 95.301,89.014
  Mid-Layer 2 w0.15: 95.338,80.541 95.481,80.541 98.138,77.884 99.352,77.884 ; 98.326,77.884 99.352,77.884 ; v1(118.605,77.47) 115.415,77.47 115.001,77.884 99.352,77.884
  Bottom Layer w0.15: v1@83.974,89.955 SW1.2@83.974,92.883 ; C16.2@90.834,73.711 90.834,75.917 90.899,75.917 91.376,76.394 C17.1@91.376,77.974 ; C17.1@91.487,77.864 91.487,78.304 91.948,78.765 v1@94.297,78.765 ; v1(93.472,79.832) 93.162,79.523 90.356,79.523 88.915,78.082 88.915,72.095 89.992,71.018 94.717,71.018 96.488,69.247 ; 94.882,66.65 95.059,66.827 97.122,66.827 D4.A@98.082,65.867 99.835,65.867 99.835,66.015 100.254,66.434 100.254,68.453 100.597,68.796 105.718,68.796 106.048,68.465 NTC2.2@106.048,66.103 ; 95.313,77.356 94.831,77.838 93.878,77.838 93.37,77.33 93.37,73.889 92.748,73.266 v1(92.748,72.949) 92.748,72.593 93.439,71.903 95.227,71.903 95.362,71.768 96.317,71.768 96.609,71.476 ; v1(96.876,70.752) 100.495,70.752 101.562,69.685 111.849,69.685 ; J2.1@104.605,89.68 107.05,89.68 107.819,90.449 108.032,90.449 109.03,91.446 J2.0@109.03,91.66 ; 106.083,67.945 106.587,67.945 R5.2@106.587,68.373 ; C12.2@107.153,82.842 107.455,82.54 107.455,79.54 C10.1@107.937,79.057
  other v1: 92.405,66.218 92.982,66.218 93.558,66.218 94.135,66.218 94.712,66.218 95.288,66.218 91.034,66.777 92.405,67.038 92.958,67.038 93.51,67.038 90.056,67.145 91.034,67.32 90.056,67.632 91.034,67.862 95.212,67.945 121.285,68.072 90.056,68.12 91.034,68.405 90.056,68.607 95.136,68.694 121.285,68.669 91.034,68.948 90.056,69.094 119.723,69.202 120.265,69.202 120.807,69.202 121.348,69.202 91.034,69.491 90.056,69.582 91.034,70.034 90.056,70.069 95.11,70.244 90.056,70.556 91.072,70.577 90.056,71.044 91.11,71.12 106.439,71.438 105.474,71.476 104.889,72.06 94.78,72.288 104.915,72.987 97.041,73.508 97.536,73.838 99.784,73.838 96.329,73.85 98.793,73.876 90.932,74.473 118.605,74.676 119.202,74.676 119.863,74.676 118.605,75.235 119.202,75.235 119.799,75.235 93.205,75.794 118.605,75.794 119.202,75.794 119.799,75.794 91.008,75.832 118.605,76.352 119.202,76.352 119.799,76.352 118.605,76.911 119.202,76.911 119.799,76.911 93.231,77.178 91.326,77.241 119.202,77.47 119.799,77.47 91.973,78.588 94.107,78.74 101.397,79.007 102.078,79.007 102.76,79.007 103.441,79.007 89.103,79.032 98.222,79.057 98.903,79.057 99.585,79.057 100.266,79.057 101.397,79.654 102.078,79.654 102.76,79.654 103.441,79.654 98.222,79.705 98.903,79.705 99.585,79.705 100.266,79.705 101.397,80.289 102.078,80.289 102.756,80.289 103.441,80.289 98.222,80.34 98.903,80.34 99.581,80.34 100.266,80.34 101.397,80.912 102.078,80.912 102.756,80.912 103.441,80.912 98.222,80.962 98.903,80.962 99.581,80.962 100.266,80.962 101.384,82.169 102.066,82.169 102.747,82.169 103.429,82.169 98.209,82.22 98.891,82.22 99.572,82.22 100.254,82.22 101.384,82.817 102.066,82.817 102.747,82.817 103.429,82.817 98.209,82.867 98.891,82.867 99.572,82.867 100.254,82.867 101.384,83.452 102.066,83.452 102.743,83.452 103.429,83.452 98.209,83.502 98.891,83.502 99.568,83.502 100.254,83.502 118.224,84.239 114.351,84.303 114.96,84.531 120.244,84.658 119.659,84.671 126.263,86.03 126.345,87.595 104.216,88.849 126.365,89.116 83.909,90.183 126.492,90.792 83.934,91.402 126.543,92.481 110.045,94.209 110.566,95.593 120.447,95.656 119.535,95.776 117.856,96.228 116.281,96.393 114.376,96.596 111.422,96.75
HLED: U2.12
ID: U2.38
IGND: R38.2 U2.44 | length 33
  Top Layer w0.15: v1(94.742,80.366) 94.974,80.134 U2.44@96.825,80.134
  Mid-Layer 2 w0.15: v1(94.742,80.366) 95.089,80.366 97.87,77.584 114.877,77.584 119.098,73.363 120.683,73.363 121.031,73.711 v1(121.031,75.248)
INT: R10.1 U2.13 U4.11 | length 20.4
  Top Layer w0.15: U2.13@104.825,83.334 105.49,83.334 v1(106.159,82.664) ; v1(120.879,81.394) 121.323,80.95 R10.1@121.345,80.95
  Mid-Layer 2 w0.15: v1(106.159,82.664) 107.03,82.664 107.807,81.888 111.547,81.888 111.957,81.478 114.91,81.478 115.89,80.497 118.006,80.497 118.427,80.919 v1(118.427,81.242)
  Bottom Layer w0.15: U4.11@117.526,83.066 117.526,81.991 v1@118.275,81.242 ; v1(118.427,81.242) v1@120.726,81.242
ISENSE: R36.2 U2.45 | length 33.6
  Top Layer w0.15: v1@94.717,79.566 94.885,79.734 U2.45@96.825,79.734
  Mid-Layer 2 w0.15: v1(94.78,79.604) 95.426,79.604 97.746,77.284 114.752,77.284 118.974,73.063 121.12,73.063 121.717,73.66 v1(121.717,75.235)
KEY-5568: U2.29 U4.14 | length 23.3
  Top Layer w0.15: v2(98.412,87.719) 98.412,87.122 99.025,86.509 U2.29@99.025,85.534
  Mid-Layer 1 w0.15: v2(98.412,87.719) 98.857,88.163 100.266,88.163 101.275,89.172 102.588,89.172 103.261,89.845 108.988,89.845 113.126,85.706 113.126,83.05 v1(113.728,82.448)
KEY-MCU: R24.1 U4.13 | length 31.7
  Top Layer w0.15: v1(91.567,89.103) 91.11,88.646 91.11,87.503 94.12,84.493 v1(94.12,82.702)
  Mid-Layer 2 w0.15: v1(94.12,82.702) 94.797,82.702 96.167,84.072 104.656,84.072 105.554,83.174 106.945,83.174 107.931,82.188 111.373,82.188 112.484,83.299 114.694,83.299 115.037,82.956 v1(115.037,82.55)
  Bottom Layer w0.15: R24.1@91.025,89.091 v1@91.605,89.091
KEY_MODE: R8.1 U2.58 | length 4.8
  Top Layer w0.15: R8.1@98.069,74.934 98.333,75.197 99.733,75.197 101.425,76.889 U2.58@101.425,77.534
LED3: U2.3
LED-R: U2.11
LX: C15.2 D5.2 L1.1 U2.4 U2.5 U2.6 U2.7 U2.8 | length 19.6
  Top Layer w0.15: U2.8@104.825,81.334 104.835,81.325 104.835,79.743 107.069,79.743 107.674,79.138 C15.2@107.674,81.712 ; D5.2@107.226,78.689 112.241,78.689 ; D5.2@107.328,78.74 112.444,78.74 L1.1@114.018,80.313
NetC2_2: C2.2 D1.2 R4.1 U1.5 | length 9.9
  Top Layer w0.15: U1.5@115.922,84.064 116.681,84.064 C2.2@117.077,83.668 117.652,83.093 119.642,83.093 D1.2@119.722,83.173 ; R4.1@119.27,88.125 119.24,88.125 118.758,87.643 118.758,84.531 119.722,83.567 D1.2@119.722,83.173 ; D1.2@119.761,83.212 D1.2@119.722,83.173
NetC8_1: C8.1 R9.2 U4.5 | length 4
  Top Layer w0.15: R9.2@113.563,88.163 113.563,88.017 114.271,87.309 114.948,87.309 115.058,87.309 115.579,87.309 115.764,87.494 C8.1@115.764,87.884
  Bottom Layer w0.15: v1@115.875,88.125 116.256,88.506 U4.5@116.256,88.866
  other v1: 115.976,88.252
NetC9_2: C9.2 C16.1 R11.2 R17.2 | length 4.6
  Bottom Layer w0.15: R11.2@89.891,72.413 C9.2@89.891,76.984
NetC15_1: C15.1 U2.9 | length 1.7
  Top Layer w0.15: U2.9@104.825,81.734 C15.1@106.552,81.734
NetC26_1: C26.1 U2.26 | length 2.3
  Top Layer w0.15: U2.26@100.225,85.534 100.225,87.661 C26.1@100.347,87.782
NetC26_2: C26.2 U2.27 | length 2.5
  Top Layer w0.15: C26.2@99.247,87.782 99.825,87.204 U2.27@99.825,85.534
NetC27_1: C27.1 U2.28 | length 3.2
  Top Layer w0.15: 99.425,86.617 U2.28@99.425,85.534 v1@99.425,86.871
  Bottom Layer w0.15: C27.1@98.615,86.741 99.022,86.741 v1(99.289,87.008)
NetC31_1: C31.1 R27.2 U3.5 | length 2.8
  Top Layer w0.3: U3.5@100.631,69.802 101.994,69.802 103.232,69.802 R27.2@103.353,69.681
NetD2_K: D2.K R11.1 R14.2 | length 9.6
  Bottom Layer w0.15: R14.2@92.456,73.986 92.456,73.685 91.034,72.263 R11.1@90.841,72.263 91.501,71.603 95.103,71.603 D2.K@96.931,69.774
NetD6_A: D6.A R28.2 | length 2.2
  Bottom Layer w0.15: R28.2@91.037,87.909 91.431,88.303 92.75,88.303 D6.A@92.957,88.51
NetD7_A: D7.A R31.2 | length 10.3
  Top Layer w0.15: v1(91.854,87.823) 92.41,88.379 99.428,88.379 v1(99.822,88.773)
  Bottom Layer w0.15: R31.2@91.037,86.635 91.69,86.635 91.854,86.799 v1(91.854,87.823)
NetD8_A: D8.A R35.2 | length 0.7
  Top Layer w0.15: R35.2@106.531,88.976 106.722,88.786 v1(107.137,88.786)
NetQ1_4: Q1.4 R25.1 R29.1 | length 28.7
  Top Layer w0.15: R29.1@93.053,73.859 93.095,73.859 v1(93.599,73.355) ; v1@93.506,73.406 v1@93.51,73.406
  Mid-Layer 2 w0.15: v1(93.599,73.355) 93.599,72.373 94.459,71.513 96.786,71.513 97.24,71.059 102.331,71.059 102.507,71.234 102.507,73.123 103.548,74.163 114.282,74.163 v1(114.745,74.625)
  Bottom Layer w0.15: Q1.4@114.684,72.527 114.684,74.463 v1@114.846,74.625 ; 114.719,73.8 R25.1@115.274,73.8
NetQ2_4: Q2.4 R26.1 R30.1 | length 29.3
  Top Layer w0.15: v1(92.9,80.797) 92.9,78.8 R30.1@93.976,77.724
  Mid-Layer 2 w0.15: v1(92.9,80.797) 92.944,80.841 95.778,80.841 97.747,78.872 97.747,78.861 98.363,78.245 109.131,78.245 v1(111.544,80.658)
  Bottom Layer w0.15: v1(111.544,80.658) 112.179,81.293 114.77,81.293 115.053,81.01 Q2.4@115.053,80.579 ; R26.1@114.167,80.579 Q2.4@114.925,80.579
NetQ3_4: Q3.4 U3.1 | length 4.7
  Top Layer w0.15: U3.1@97.955,70.917 98.577,70.917 98.819,70.675 98.819,68.402 98.978,68.243 99.396,68.243 Q3.4@99.95,67.688
NetQ3_5: Q3.5 U3.3 | length 2
  Top Layer w0.15: Q3.5@96.95,67.688 96.95,68.464 97.503,69.017 U3.3@97.955,69.017
NetQ4_4: Q4.4 R34.2 | length 42.8
  Mid-Layer 2 w0.15: v1(94.285,76.619) 96.043,74.861 113.172,74.861 113.749,75.438 115.423,75.438 116.022,74.838 116.022,72.268 117.208,71.082 123.38,71.082 124.155,71.857 v1@124.155,78.537
  Bottom Layer w0.15: Q4.4@122.641,78.597 v1@124.329,78.597
  other v1: 124.219,78.473
NetQ5_4: Q5.4 R33.1 | length 37
  Top Layer w0.15: v1@94.374,73.355 R33.1@94.374,73.859 ; R33.1@94.44,73.793 R33.1@94.45,73.803 ; v1@94.45,73.317 v1@94.45,73.355
  Mid-Layer 2 w0.15: v1@94.305,73.17 94.305,72.092 94.583,71.813 96.919,71.813 97.374,71.359 102.044,71.359 102.207,71.521 102.207,73.619 103.149,74.561 113.634,74.561 114.173,75.1 115.336,75.1 115.722,74.714 115.722,71.907 117.107,70.523 v1@123.038,70.523
  other v1: 123.076,70.51 94.361,73.343
NetR18_1: R18.1 U5.1 | length 45.6
  Top Layer w0.15: v1@90.729,65.672 89.416,66.985 89.416,77.498 90.898,78.981 90.898,81.023 91.917,82.042 92.634,82.042 v1@93.154,82.563
  Mid-Layer 2 w0.15: v1(90.792,65.735) 90.992,65.536 92.431,65.536 98.474,65.536 102.807,69.868 102.807,72.998 103.672,73.863 104.965,73.863 U5.1@106.172,72.657
  Bottom Layer w0.15: R18.1@90.949,85.34 R18.1@91.037,85.34 ; 91.474,85.34 R18.1@91.037,85.34 ; v1(93.154,82.677) 93.154,84.709 92.503,85.361 R18.1@91.037,85.361 R18.1@91.037,85.34
NetR19_1: R19.1 U5.2 | length 39.6
  Top Layer w0.15: v1(89.878,65.837) 89.116,66.599 89.116,77.622 90.598,79.105 90.598,81.147 v1@92.268,82.817
  Mid-Layer 2 w0.15: v1@89.897,65.856 90.517,65.236 98.599,65.236 103.632,70.269 U5.2@103.632,72.657
  Bottom Layer w0.15: R19.1@90.961,84.082 91.042,84.082 R19.1@91.037,84.087 92.012,84.087 92.469,83.629 v1(92.469,82.817)
NetR20_1: R20.1 U5.3 | length 24.1
  Top Layer w0.15: v1(92.621,81.483) 91.783,81.483 91.198,80.899 91.198,78.105 90.792,77.699 90.792,77.103 91.589,76.306 91.589,72.141 92.517,71.213 95.883,71.213 96.166,71.496 99.932,71.496 U5.3@101.092,72.657
  Bottom Layer w0.15: R20.1@90.961,82.787 R20.1@91.037,82.787 ; R20.1@91.037,82.812 91.529,82.321 92.291,82.321 92.621,81.991 v1(92.621,81.483) 92.545,81.559 v1@92.545,81.445
NetR21_1: R21.1 U5.4 | length 18.8
  Top Layer w0.15: v1(92.037,80.861) 91.63,80.861 91.498,80.729 91.498,79.019 91.498,78.019 91.889,77.628 91.889,72.266 92.642,71.513 95.402,71.513 95.72,71.832 96.38,71.832 96.477,71.832 97.727,71.832 U5.4@98.552,72.657
  Bottom Layer w0.15: R21.1@90.987,81.53 R21.1@91.046,81.53 ; 91.512,81.53 R21.1@91.046,81.53 ; v1(92.037,80.861) 92.037,81.407 91.906,81.538 R21.1@91.037,81.538 R21.1@91.046,81.53
NetR22_1: R22.1 U5.5 | length 13.5
  Top Layer w0.15: v1@92.448,79.916 92.448,78.391 92.189,78.132 92.189,72.39 92.766,71.813 95.169,71.813 U5.5@96.012,72.657
  Bottom Layer w0.15: R22.1@90.987,80.234 R22.1@91.054,80.234 ; R22.1@91.037,80.251 R22.1@91.054,80.234 ; v1(92.304,80.061) 91.228,80.061 R22.1@91.054,80.234
NetR24_2: R24.2 SW1.1 | length 4.5
  Bottom Layer w0.15: SW1.1@88.174,92.883 88.174,90.842 R24.2@89.925,89.091
NetR32_2: R32.2 U3.2 | length 1.4
  Top Layer w0.15: U3.2@97.866,69.802 U3.2@97.955,69.802
  Top Layer w0.3: R32.2@96.609,69.567 96.844,69.802 U3.2@97.866,69.802